# Altium PCB agent-mother.PcbDoc (part 1 of 2)
Units mil, origin at the board's own origin, x right, y up, seen from the top; angles counter-clockwise.
Board outline 953.44 x 2371.62 mil, 4 copper layers (Top Layer, Layer 1, Layer 2, Bottom Layer), stack 62.493 mil thick; 58 components, 47 nets, 288 pads, 86 vias.
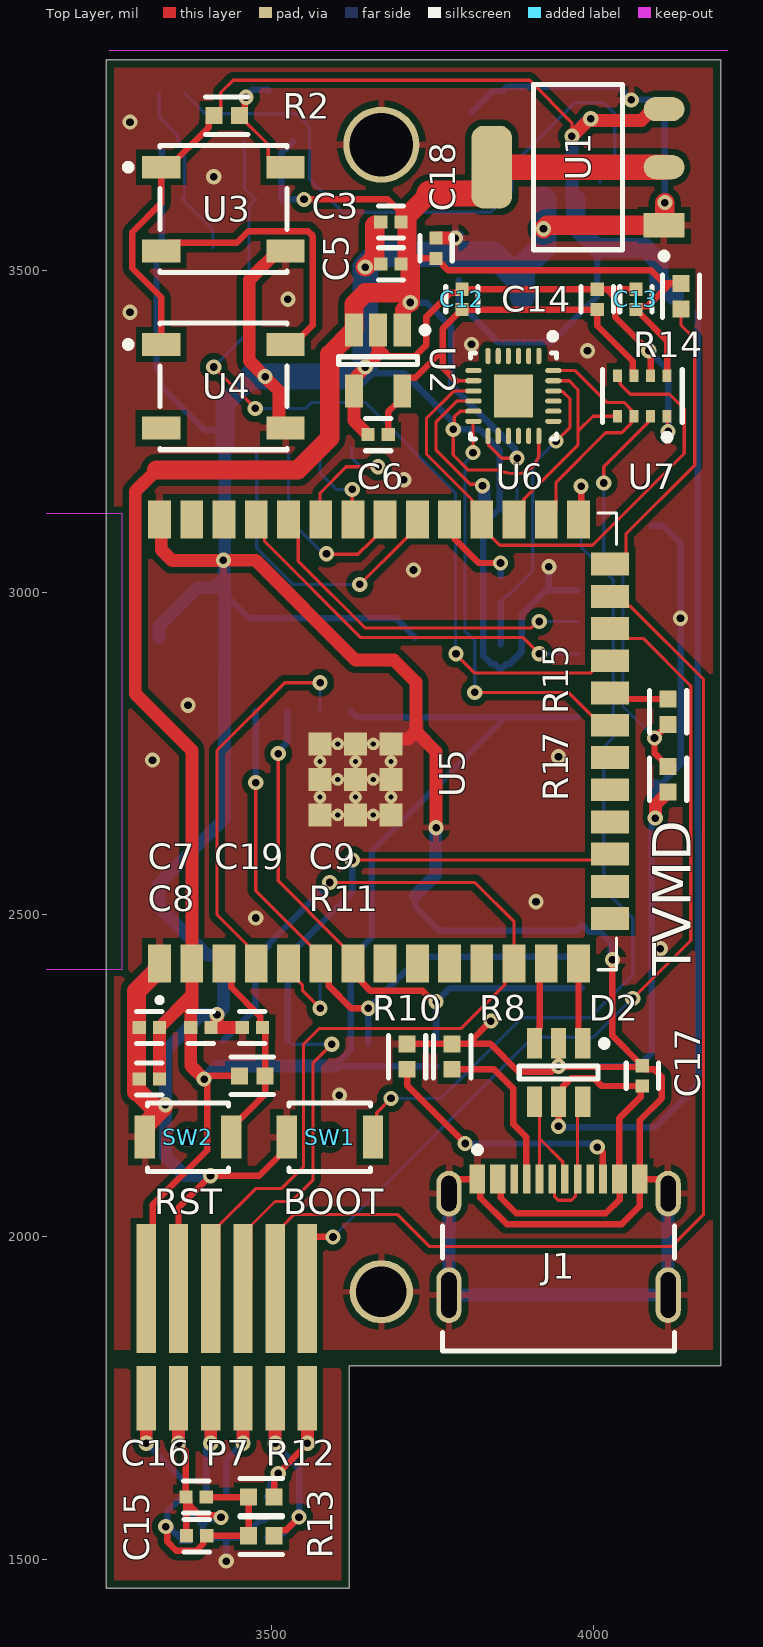
[diagram p0: Top Layer view]
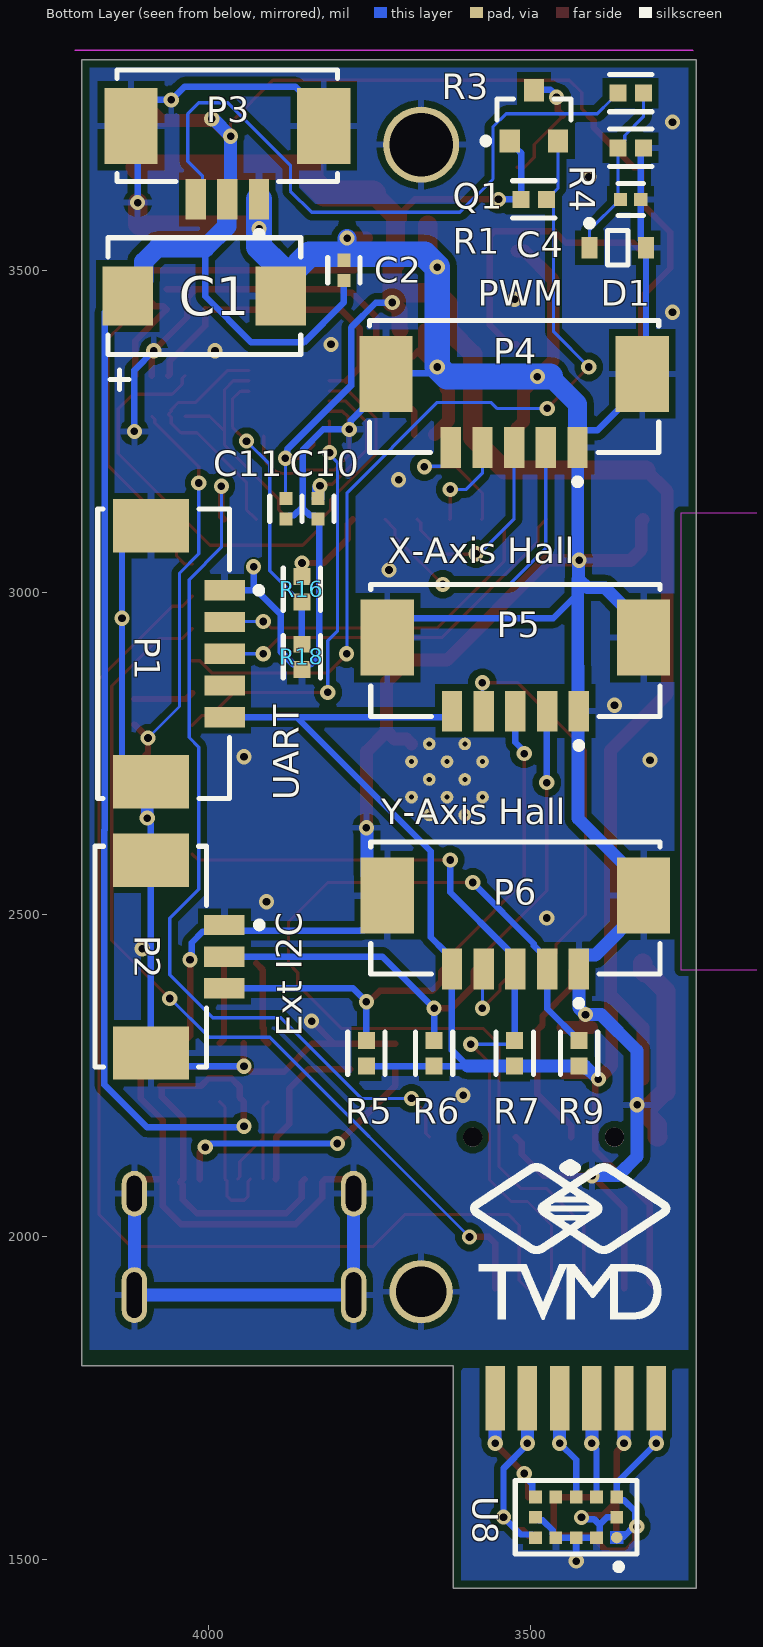
[diagram p1: Bottom Layer view, seen from below]
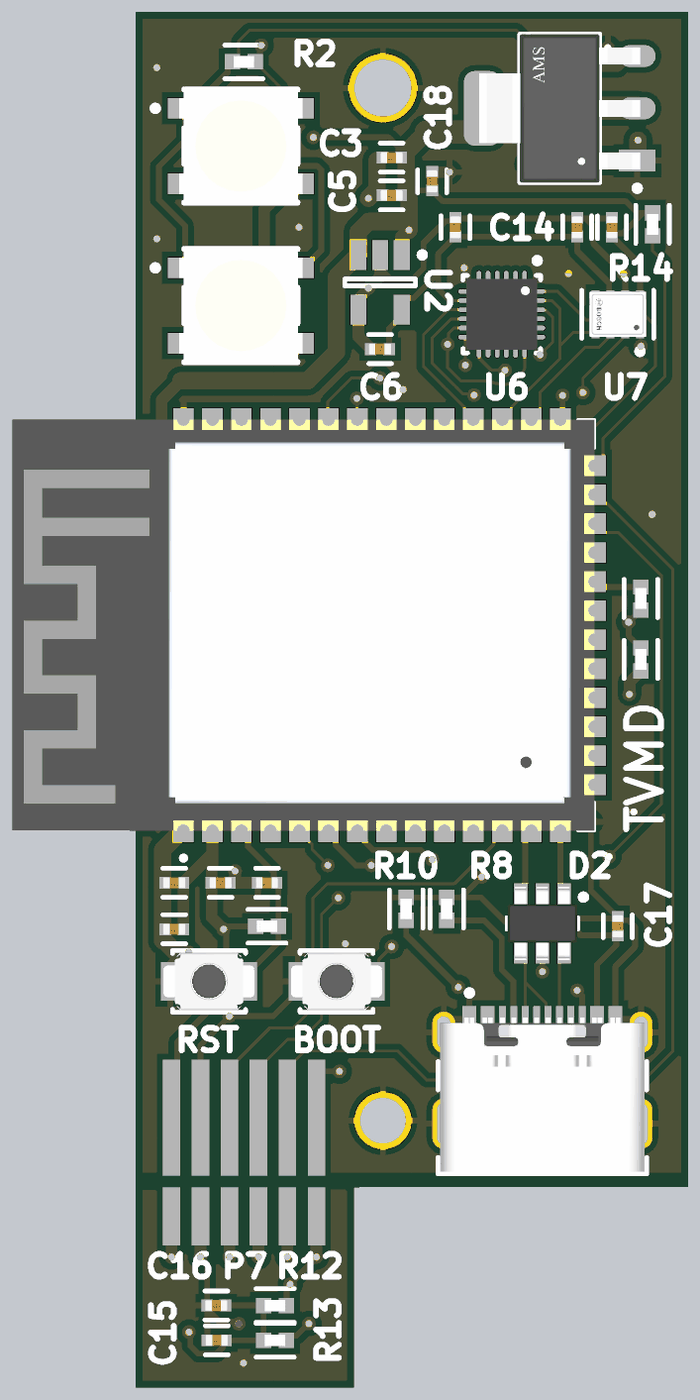
[diagram p2: 3D render of the assembled board from above, using the file's embedded part models]
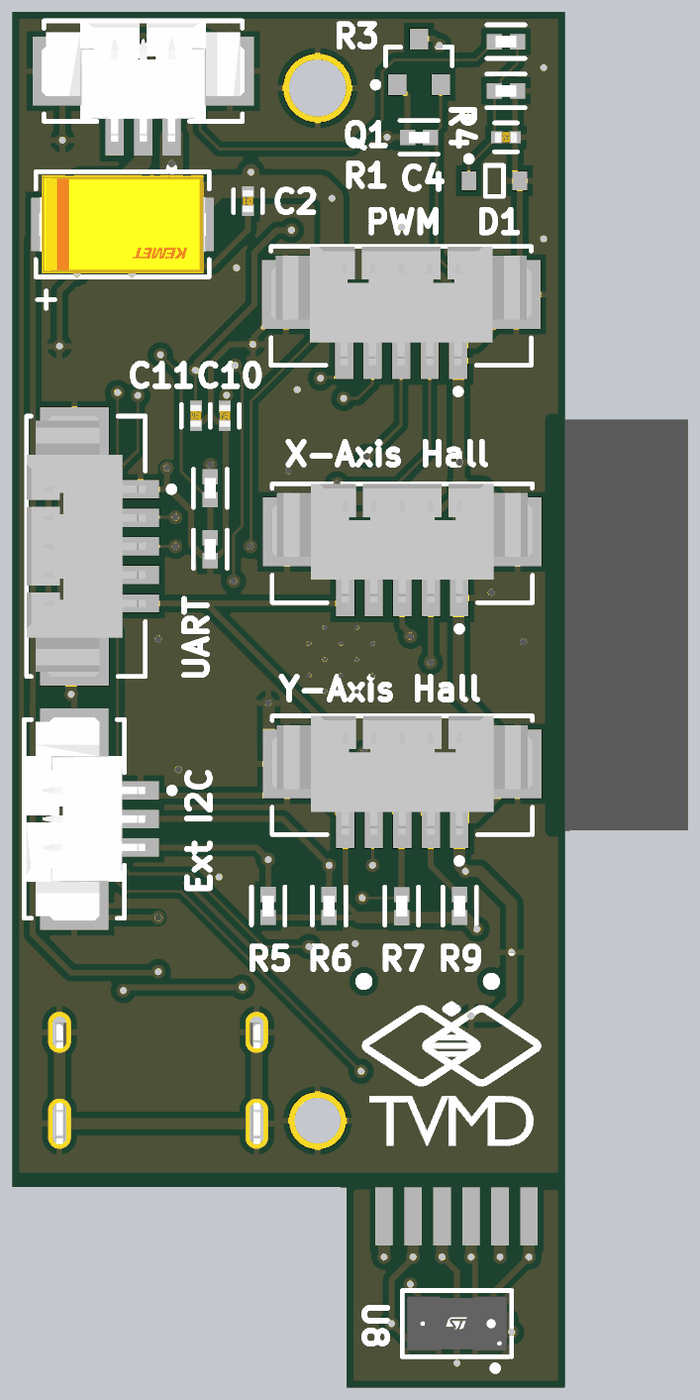
[diagram p3: 3D render of the assembled board from below, using the file's embedded part models]

## Layer stack, top to bottom
Top Solder: solder mask 0.4, Solder Resist, Dk 3.8
Top Layer: signal copper 1.4
Dielectric 2: prepreg 8.2835, PP-006, Dk 4.6
Layer 1: signal copper 0.5984
Dielectric 1: dielectric 41.9291, FR-4, Dk 4.6
Layer 2: signal copper 0.5984
Dielectric 3: prepreg 8.2835, PP-006, Dk 4.6
Bottom Layer: signal copper 1.4
Bottom Solder: solder mask 0.4, Solder Resist, Dk 3.8

## Board outline
3243.17,1455 3243.17,3826.62 4196.61,3826.62 4196.61,1800 3620,1800 3620,1455
cut-out: 3248.05,3840.78 3248.68,3841.4 4207.77,3841.4

## Design rules (kind name [scope] priority, off if disabled: settings)
BoardOutlineClearance [All] p1: gap=11.81 ignorepadtopadclearanceinfootprint=FALSE
Clearance [All] p1: gap=10 ignorepadtopadclearanceinfootprint=TRUE except(0: Arc-Hole Track-Hole SMDPad-Hole THPad-Hole Via-Hole Fill-Hole Poly-Hole Region-Hole Text-Hole; 5: Arc-Arc Arc-Track Track-Track SMDPad-SMDPad SMDPad-THPad THPad-THPad; 7.87: Arc-SMDPad Track-SMDPad Track-THPad)
HoleSize [IsVia] p1: absolutevalues=TRUE maxlimit=248.03 minlimit=7.87 maxpercent=80.000 minpercent=20.000
MinimumAnnularRing [All] p1: minimumring=5.12
MinimumSolderMaskSliver [All] p1: minsoldermaskwidth=3.94
PolygonConnect [All] p1: connectstyle=Relief reliefconductorwidth=10 reliefentries=4 polygonreliefangle="90 Angle" airgapwidth=10
RoutingVias [All] p1: holewidth=11.81 width=19.68 viastyle="Through Hole" minholewidth=11.81 minwidth=17.72 maxholewidth=28 maxwidth=50
SilkToSolderMaskClearance [IsPad] p1: minsilkscreentomaskgap=5.91 clearancetoexposedcopper=TRUE
SolderMaskExpansion [All] p1: expansion=1.5 istentingtop=FALSE
Width [All] p1: maxlimit=100 minlimit=5 preferedwidth=10
27 further rules are at their usual default settings.

## Classes and differential pairs
net class USB: GND NetD2_4 NetD2_6 NetJ1_A5 NetJ1_A8 NetJ1_B5 NetJ1_B8 "USB D+" "USB D-" VCC
net class Power: +1V8 +3V3 GND V_Bat V_Bat_Measure VCC
net class IMU: +1V8 +3V3 GND IMU_CS IMU_INT NetC10_1 NetU6_7 NetU6_21 NetU6_25 SCLK SDI SDO
net class BMP: +1V8 +3V3 BMP_CS GND SCLK SDI SDO
net class MCU: +3V3 BMP_CS BMP_CS_3V3 BOOT esc_p1_pwm esc_p2_pwm EXT_SCL EXT_SDA GND Hall_INT_x Hall_INT_y IMU_CS IMU_CS_3V3 IMU_INT LED NetU5_10 NetU5_11 NetU5_15 NetU5_16 NetU5_18 NetU5_19 NetU5_20 NetU5_21 NetU5_22 NetU5_38 NetU5_39 OPT_INT OPT_shutdown RST RX SCL SCLK SDA SDI SDO TX "USB D+" "USB D-" VDD_SPI_EN x_servo_pwm y_servo_pwm
net class LED: +3V3 GND LED NetQ1_3 NetU3_2 NetU4_2 VCC
net class CNT: +3V3 esc_p1_pwm esc_p2_pwm EXT_SCL EXT_SDA GND Hall_INT_x Hall_INT_y NetP1_4 RX SCL SDA TX x_servo_pwm y_servo_pwm
net class OPT: +3V3 EXT_OPT+3V3 EXT_OPT_GND EXT_OPT_INT EXT_OPT_SCL EXT_OPT_SDA EXT_OPT_shutdown GND NetJ1_A8 NetJ1_B8 NetP1_4 NetU4_2 NetU5_10 NetU5_11 NetU5_15 NetU5_16 NetU5_18 NetU5_19 NetU5_20 NetU5_21 NetU5_22 NetU5_38 NetU5_39 NetU6_7 NetU6_21 NetU6_25 NetU8_8 OPT_INT OPT_shutdown SCL SDA
component class agent-mother-sensor: C10 C11 C12 C13 C14 C15 C16 P7 R12 R13 U6 U7 U8
component class agent-mother: C1 C2 C3 C4 C5 C6 C7 C8 C9 C17 C18 C19 D1 D2 J1 P1 P2 P3 P4 P5 P6 Q1 R1 R2 R3 R4 R5 R6 R7 R8 R9 R10 R11 R14 R15 R16 R17 R18 SW1 SW2 U1 U2 U3 U4 U5

## Components (designator, comment, footprint, x,y, rotation, side; value= is the part's Value field where it differs from the comment)
C1 "100uF" FP-T495D107K016ATE125-MFG 4006.5,3460 r0 bottom
C2 "1uF" FP-C0402-BB-MFG 3790,3500 r90 bottom value=0.1uF
C3 "10uF" FP-C0402-BB-MFG 3685,3575 r180 top value=0.1uF
C4 "0.1uF" FP-C0402-BB-MFG 3345,3610 r180 bottom
C5 "1uF" FP-C0402-BB-MFG 3685,3510 r180 top value=0.1uF
C6 "1uF" FP-C0402-BB-MFG 3665,3245 r180 top value=0.1uF
C7 "10uF" FP-C0402-BB-MFG 3310,2325 r180 top value=0.1uF
C8 "0.1uF" FP-C0402-BB-MFG 3310,2245 r180 top
C9 "1uF" FP-C0402-BB-MFG 3470,2325 r180 top value=0.1uF
C10 "0.1uF" FP-C0402-BB-MFG 3830,3130 r270 bottom
C11 "0.1uF" FP-C0402-BB-MFG 3880,3130 r270 bottom
C12 "0.1uF" FP-C0402-BB-MFG 3795,3455 r90 top
C13 "0.1uF" FP-C0402-BB-MFG 4065,3455 r90 top
C14 "0.1uF" FP-C0402-BB-MFG 4005,3455 r90 top
C15 "4.7uF" FP-C0402-BB-MFG 3383.31,1536.35 r180 top value=0.1uF
C16 "0.1uF" FP-C0402-BB-MFG 3382.56,1596.35 r180 top
C17 "0.1uF" FP-C0402-BB-MFG 4075,2250 r90 top
C18 "10uF" FP-C0402-BB-MFG 3755,3534.25 r90 top value=0.1uF
C19 "10uF" FP-C0402-BB-MFG 3390,2325 r0 top value=0.1uF
D1 "3V3" ONSC-SOD-323-2-477-02_V 3365,3535 r180 bottom
D2 "USBLC6-2P6" "SOT-23-6 USBLC6" 3945,2255 r270 top
J1 "217179-0001" FP-217179-0001-MFG 3945,1955 r0 top
P1 "UART" MOLX-52361-0571-5_V 3975,2905 r270 bottom
P2 "Ext I2C" FP-53261-0371-MFG 4089.53,2435 r270 bottom
P3 "Power Source" FP-53261-0371-MFG 3970.79,3724.17 r0 bottom
P4 "PWM" MOLX-52361-0571-5_V 3525.79,3225 r0 bottom
P5 "X-Axis Hall" MOLX-52361-0571-5_V 3523.82,2815.83 r0 bottom
P6 "Y-Axis Hall" MOLX-52361-0571-5_V 3523.82,2415.83 r0 bottom
P7 "Out board connector" "Edge Connector" 3430.24,1810 r0 top
Q1 "BSS138LT1" ONSC-SOT-23-3-318-08_V 3495,3740 r90 bottom
R1 "100k" FP-CRCW0402-e3-IPC_A 3495,3610 r180 bottom
R2 "100k" FP-CRCW0402-e3-IPC_A 3430,3740 r0 top
R3 "100k" FP-CRCW0402-e3-IPC_A 3345,3775 r0 bottom
R4 "470k" FP-CRCW0402-e3-IPC_A 3345,3690 r0 bottom
R5 "4k7" FP-CRCW0402-e3-IPC_A 3755,2285 r270 bottom
R6 "4k7" FP-CRCW0402-e3-IPC_A 3650,2285 r270 bottom
R7 "4k7" FP-CRCW0402-e3-IPC_A 3525,2284.77 r270 bottom
R8 "5k1" FP-CRCW0402-e3-IPC_A 3780,2280 r90 top
R9 "4k7" FP-CRCW0402-e3-IPC_A 3425,2285 r270 bottom
R10 "5k1" FP-CRCW0402-e3-IPC_A 3710,2280 r90 top
R11 "10k" FP-CRCW0402-e3-IPC_A 3470,2250 r180 top
R12 "10k" FP-CRCW0402-e3-IPC_A 3483.98,1596.35 r180 top
R13 "10k" FP-CRCW0402-e3-IPC_A 3483.98,1536.35 r180 top
R14 "10k" FP-CRCW0402-e3-IPC_A 4135,3460 r90 top
R15 "5k1" FP-CRCW0402-e3-IPC_A 4115,2815 r270 top
R16 "5k1" FP-CRCW0402-e3-IPC_A 3855,3005 r270 bottom
R17 "4k7" FP-CRCW0402-e3-IPC_A 4115,2710 r270 top
R18 "4k7" FP-CRCW0402-e3-IPC_A 3855,2900 r270 bottom
SW1 "BOOT" FP-B3U-1000P-B-MFG 3590,2155 r0 top
SW2 "RST" FP-B3U-1000P-B-MFG 3370,2155 r0 top
U1 "AMS1117-3.3" FP-AMS1117-IPC_A 3975,3660 r180 top
U2 "TPS78218DDCR" SOT-23-OT5_M 3665,3360 r270 top
U3 "ws2812" ADA-RGB-1655_V 3425,3595 r0 top
U4 "ws2812" ADA-RGB-1655_V 3425,3320 r0 top
U5 "ESP32-S3-WROOM-1-N8R2" XCVR_ESP32S3WROOM1N8R8 3533.03,2769.06 r90 top
U6 "ICM-20948" TDK-QFN-24_L 3875,3305 r270 top
U7 "BMP280" FP-BMP280-MFG 4075,3305 r270 top
U8 "VL53L0CXV0DH/1" FP-LGA-12-MFG 3429.49,1565 r180 bottom

## Footprints (in the part's own frame and the unit in brackets; to place one, negate y for a bottom-side part, rotate by r counter-clockwise, add the part's x,y. Pads: shape width x height; smd on the part's side, far side on the other; paste and mask are expansions set on the pad)
ADA-RGB-1655_V [mm] "SMD, 4-Leads, Body 5x5mm"
  rect 1.5x0.9 smd: 1(-2.45,1.65) 2(-2.45,-1.65) 3(2.45,-1.65) 4(2.45,1.65)
  silkscreen extent -3.87,-2.5 2.5,2.5, body extent -2.7,-2.5 2.7,2.5, height 1.68
"Edge Connector" [mil]
  rect 30x100 smd mask+0: 1(-125,-60) 2(-75,-60) 3(-25,-60) 4(25,-60) 5(75,-60) 6(125,-60)
  rect 30x100 smd far side paste+0 mask+0: 1(-125,-60) 2(-75,-60) 3(-25,-60) 4(25,-60) 5(75,-60) 6(125,-60)
  rect 30x200 smd paste+0 mask+0: 7(125,110) 8(75,110) 9(25,110) 10(-25,110) 11(-75,110) 12(-125,110)
  Top Layer lines w20: -125,-130 -125,-60 ; -75,-130 -75,-60 ; -25,-130 -25,-60 ; 25,-130 25,-60 ; 75,-130 75,-60 ; 125,-130 125,-60
  Bottom Layer lines w20: -125,-130 -125,-60 ; -75,-130 -75,-60 ; -25,-130 -25,-60 ; 25,-130 25,-60 ; 75,-130 75,-60 ; 125,-130 125,-60
FP-53261-0371-MFG [mm]
  rect 0.8x1.6 smd paste+0 mask+0: 1(-1.25,2.9) 2(0,2.9) 3(1.25,2.9)
  rect 2.1x3 smd paste+0 mask+0: 4(-3.8,0) 5(3.8,0)
  silkscreen extent -4.35,-2.2 4.35,4.4, body extent -4.45,-2.1 4.45,3.1, height 3.6
FP-217179-0001-MFG [mm]
  rrect100% 1x1.8 hole 1.4 slot 0.6 at 0 deg paste-1000 mask+0: 1(-4.32,2.85) 2(4.32,2.85)
  rrect100% 1x2.2 hole 1.8 slot 0.6 at 0 deg paste-1000 mask+0: 3(-4.32,-1.15) 4(4.32,-1.15)
  rect 0.6x1.15 smd paste+0 mask+0: A1-B12(-3.2,3.425) A4-B9(-2.4,3.425) B1-A12(3.2,3.425) B4-A9(2.4,3.425)
  rect 0.3x1.15 smd paste+0 mask+0: A5(-1.25,3.425) A6(-0.25,3.425) A7(0.25,3.425) A8(1.25,3.425) B5(1.75,3.425) B6(0.75,3.425) B7(-0.75,3.425) B8(-1.75,3.425)
  silkscreen extent -4.57,-3.35 4.57,4.7, body extent -4.92,-3.45 4.92,4.1, height 0.25
FP-AMS1117-IPC_A [mm]
  rect 1.604x0.952 smd paste+0 mask+0: 1(-3.395,2.29)
  rrect100% 1.604x0.952 smd paste+0 mask+0: 2(-3.395,0) 3(-3.395,-2.29)
  rrect59% 1.604x3.262 smd paste+0 mask+0: 4(3.395,0)
  silkscreen extent -3.52,-3.25 1.75,3.62, body extent -4.7,-3.75 4.7,3.75, height 0.25
FP-B3U-1000P-B-MFG [mm]
  rect 0.8x1.7 smd paste+0 mask+0: 1(-1.7,0) 2(1.7,0)
  round 0.75 hole 0.75 unplated paste-1000 mask+0: ""(0,0)
  silkscreen extent -1.6,-1.35 1.6,1.35, body extent -2.2,-1.45 2.2,1.45, height 0.25
FP-BMP280-MFG [mm]
  rect 0.5x0.35 smd paste+0 mask+0: 1(0.8,0.975) 2(0.8,0.325) 3(0.8,-0.325) 4(0.8,-0.975) 5(-0.8,-0.975) 6(-0.8,-0.325) 7(-0.8,0.325) 8(-0.8,0.975)
  silkscreen extent -1.05,-1.58 1.75,1.58, body extent -1.55,-1.8 1.55,1.8, height 0.25
FP-C0402-BB-MFG [mm]
  rect 0.52x0.52 smd paste+0 mask+0: 1(-0.4,0) 2(0.4,0)
  silkscreen extent -0.5,-0.64 0.5,0.64, body extent -0.5,-0.25 0.5,0.25, height 0.55
FP-CRCW0402-e3-IPC_A [mil]
  rect 26.31x26.48 smd paste+0 mask+0: 1(-19.77,0) 2(19.77,0)
  silkscreen extent -33,-29 33,29, body extent -20,-10 20,10, height 16
FP-LGA-12-MFG [mm]
  round 0.45 smd paste+0 mask+0: 1(1.6,-0.8)
  rect 0.5x0.5 smd paste+0 mask+0: 2(0.8,-0.8) 3(0,-0.8) 4(-0.8,-0.8) 5(-1.6,-0.8) 6(-1.6,0) 7(-1.6,0.8) 8(-0.8,0.8) 9(0,0.8) 10(0.8,0.8) 11(1.6,0.8) 12(1.6,0)
  Top Layer region: 1.35,-0.55 1.93,-0.55 1.93,-0.8 1.85,-0.8 1.85,-1.05 1.35,-1.05
  silkscreen extent -2.4,-2.07 2.4,1.45, body extent -2.2,-1.2 2.2,1.2, height 1.05
FP-T495D107K016ATE125-MFG [mm]
  rect 1.99x2.33 smd paste+0 mask+0: 1(-3.01,0) 2(3.01,0)
  silkscreen extent -3.8,-2.3 3.8,3.68, body extent -3.65,-2.15 3.65,2.15, height 3.1
MOLX-52361-0571-5_V [mm] "SMD, 5-Leads, Body 11.4x5.2mm, Pitch 1.25mm"
  rect 0.8x1.6 smd: 1(-2.5,0) 2(-1.25,0) 3(0,0) 4(1.25,0) 5(2.5,0)
  rect 2.1x3 smd: MP1(-5.05,-2.9) MP2(5.05,-2.9)
  silkscreen extent -5.7,-5 5.7,1.47, body extent -5.7,-5 5.7,0.2, height 3.4
ONSC-SOD-323-2-477-02_V [mm] "SOD, 2-Leads, Body 1.7x1.25mm"
  rect 0.63x0.83 smd: 1(-1.115,0) 2(1.115,0)
  silkscreen extent -1.24,-0.67 0.4,1.09, body extent -0.85,-0.63 0.85,0.63, height 1.06
ONSC-SOT-23-3-318-08_V [mm] "SOT23, 3-Leads, Body 2.92x1.3mm, Pitch 0.95mm"
  rect 0.9x0.8 smd: 1(-1,0.95) 2(-1,-0.95) 3(1,0)
  silkscreen extent -1.12,-1.46 0.65,2.03, body extent -0.65,-1.46 0.65,1.46, height 1.11
"SOT-23-6 USBLC6" [mm]
  rect 1.2x0.6 smd: 1(-1.15,0.95) 2(-1.15,0) 3(-1.15,-0.95) 4(1.15,-0.95) 5(1.15,0) 6(1.15,0.95)
  silkscreen extent -1.27,-1.55 0.25,1.93, body extent -1.6,-1.53 1.6,1.53, height 1.45
SOT-23-OT5_M [mm] "SOT23, 5-Leads, Body 2.9x1.7mm, Pitch 0.95mm, Lead Span 2.8mm, IPC Low Density"
  rect 1.3x0.7 smd: 1(-1.2,0.95) 2(-1.2,0) 3(-1.2,-0.95) 4(1.2,-0.95) 5(1.2,0.95)
  silkscreen extent -1.32,-1.55 0.15,1.98, body extent -0.9,-1.55 0.9,1.55, height 1.45
TDK-QFN-24_L [mm] "QFN, 24-Leads, Body 3.10x3.10mm, Pitch 0.40mm, Thermal Pad 1.70x1.54mm, IPC High Density"
  oval 0.65x0.2 smd: 1(-1.575,1) 2(-1.575,0.6) 3(-1.575,0.2) 4(-1.575,-0.2) 5(-1.575,-0.6) 6(-1.575,-1) 13(1.575,-1) 14(1.575,-0.6) 15(1.575,-0.2) 16(1.575,0.2) 17(1.575,0.6) 18(1.575,1)
  oval 0.2x0.65 smd: 7(-1,-1.575) 8(-0.6,-1.575) 9(-0.2,-1.575) 10(0.2,-1.575) 11(0.6,-1.575) 12(1,-1.575) 19(1,1.575) 20(0.6,1.575) 21(0.2,1.575) 22(-0.2,1.575) 23(-0.6,1.575) 24(-1,1.575)
  rect 1.7x1.54 smd: 25(0,0)
  silkscreen extent -2.47,-1.7 1.7,1.7, body extent -1.55,-1.55 1.55,1.55, height 1.05
XCVR_ESP32S3WROOM1N8R8 [mm]
  rect 1.5x0.9 smd: 1(-8.75,5.26) 2(-8.75,3.99) 3(-8.75,2.72) 4(-8.75,1.45) 5(-8.75,0.18) 6(-8.75,-1.09) 7(-8.75,-2.36) 8(-8.75,-3.63) 9(-8.75,-4.9) 10(-8.75,-6.17) 11(-8.75,-7.44) 12(-8.75,-8.71) 13(-8.75,-9.98) 14(-8.75,-11.25) 27(8.75,-11.25) 28(8.75,-9.98) 29(8.75,-8.71) 30(8.75,-7.44) 31(8.75,-6.17) 32(8.75,-4.9) 33(8.75,-3.63) 34(8.75,-2.36) 35(8.75,-1.09) 36(8.75,0.18) 37(8.75,1.45) 38(8.75,2.72) 39(8.75,3.99) 40(8.75,5.26)
  rect 0.9x1.5 smd: 15(-6.985,-12.5) 16(-5.715,-12.5) 17(-4.445,-12.5) 18(-3.175,-12.5) 19(-1.905,-12.5) 20(-0.635,-12.5) 21(0.635,-12.5) 22(1.905,-12.5) 23(3.175,-12.5) 24(4.445,-12.5) 25(5.715,-12.5) 26(6.985,-12.5)
  rect 0.9x0.9 smd: 41_1(-1.5,-2.46) 41_2(-2.9,-2.46) 41_3(-0.1,-2.46) 41_4(-2.9,-3.86) 41_5(-1.5,-3.86) 41_6(-0.1,-3.86) 41_7(-2.9,-1.06) 41_8(-1.5,-1.06) 41_9(-0.1,-1.06)
  round 0.5 hole 0.2 mask+0: 41_10(-1.5,-1.76) 41_11(-2.9,-1.76) 41_12(-0.1,-1.76) 41_13(-2.9,-3.16) 41_14(-1.5,-3.16) 41_15(-0.1,-3.16) 41_16(-2.2,-1.06) 41_17(-0.8,-1.06) 41_18(-2.2,-2.46) 41_19(-0.8,-2.46) 41_20(-2.2,-3.86) 41_21(-0.8,-3.86)
  Keep-Out Layer region: 9,6.75 -9,6.75 -9,12.75 9,12.75
  Keep-Out Layer region: 9,6.75 -9,6.75 -9,12.75 9,12.75
  silkscreen extent -10.3,-12.75 9,5.36, body extent -9,-12.75 9,12.75, height 3.25

## Part data
C1: library part CMP-2000-07207-2, "CAP TANT 100UF 10% 16V 2917", Case Code (Imperial)=2917, Case Code (Metric)=7343, Dielectric Material=Tantalum, ESR (Equivalent Series Resistance)=125mR, Max Operating Temperature=125°C, Min Operating Temperature=-55°C, Package Quantity=1, Tolerance=10%, Voltage=16V, Capacitance=100uF, Case/Package=2917, Construction=Flat, Depth=4.3mm, Dissipation Factor=8%, Failure Rate=0.001%, Features="General Purpose", Height=2.8mm, Height - Seated (Max)=0.122inch, Length=7.3mm, Life (Hours)=2000Hour, Mount="Surface Mount", Number of Pins=2, Packaging="Tape and Reel", Polarity=Polar, Radiation Hardening=No, REACH SVHC="No SVHC", RoHS Compliant=Yes, Series=T495, Termination=SMD/SMT, Voltage Rating=16V, Voltage Rating (DC)=16V, Weight=0.023634oz, Width=0.169inch
C2 C5 C6 C9: library part CMP-2008-02108-2, "CAP CER 1uF 16V X7R 0402", Capacitance=0.1uF, Manufacturer=Kemet, Manufacturer Part Number=C0402C104K4RACTU, Package=C0402-BB, Temperature="-55°C to +125°C", Temperature Characteristic=X7R, Temperature Coefficient=15%, Temperature Range High=+125°C, Temperature Range Low=-55°C, Tolerance=0.1, Voltage Rating="16 V", Automotive=No, Category=Cap, ComponentLink2Description=Datasheet, ComponentLink2URL=https://content.kemet.com/datasheets/KEM_C1002_X7R_SMD.pdf, Device Class L1="Passive Components", Device Class L2=Capacitors, Device Class L3="Ceramic Capacitors", Digikey Description="CAP CER 0.1UF 16V X7R 0402", Height=0.55mm, Ipc Land Pattern Name=CAPC10050X50, Lead Free=Yes, Material=Ceramic, Mouser Description="Cap Ceramic 0.1uF 16V X7R 10% SMD 0402 125?C Paper T/R - Tape and Reel (Alt: C0402C104K4RAC TU)", Octopart=https://octopart.com/c0402c104k4ractu-kemet-94158, RoHS=TRUE
C3 C7 C18 C19: library part CMP-2008-02108-2, "CAP CER 22uF 16V X7R 0402", Capacitance=0.1uF, Manufacturer=Kemet, Manufacturer Part Number=C0402C104K4RACTU, Package=C0402-BB, Temperature="-55°C to +125°C", Temperature Characteristic=X7R, Temperature Coefficient=15%, Temperature Range High=+125°C, Temperature Range Low=-55°C, Tolerance=0.1, Voltage Rating="16 V", Automotive=No, Category=Cap, ComponentLink2Description=Datasheet, ComponentLink2URL=https://content.kemet.com/datasheets/KEM_C1002_X7R_SMD.pdf, Device Class L1="Passive Components", Device Class L2=Capacitors, Device Class L3="Ceramic Capacitors", Digikey Description="CAP CER 0.1UF 16V X7R 0402", Height=0.55mm, Ipc Land Pattern Name=CAPC10050X50, Lead Free=Yes, Material=Ceramic, Mouser Description="Cap Ceramic 0.1uF 16V X7R 10% SMD 0402 125?C Paper T/R - Tape and Reel (Alt: C0402C104K4RAC TU)", Octopart=https://octopart.com/c0402c104k4ractu-kemet-94158, RoHS=TRUE
C4 C8 C10 C11 C12 C13 C14 C16 C17: library part CMP-2008-02108-2, "CAP CER 0.1uF 16V X7R 0402", Manufacturer=Kemet, Manufacturer Part Number=C0402C104K4RACTU, Package=C0402-BB, Temperature="-55°C to +125°C", Temperature Characteristic=X7R, Temperature Coefficient=15%, Temperature Range High=+125°C, Temperature Range Low=-55°C, Tolerance=0.1, Voltage Rating="16 V", Automotive=No, Capacitance=0.1uF, Category=Cap, ComponentLink2Description=Datasheet, ComponentLink2URL=https://content.kemet.com/datasheets/KEM_C1002_X7R_SMD.pdf, Device Class L1="Passive Components", Device Class L2=Capacitors, Device Class L3="Ceramic Capacitors", Digikey Description="CAP CER 0.1UF 16V X7R 0402", Height=0.55mm, Ipc Land Pattern Name=CAPC10050X50, Lead Free=Yes, Material=Ceramic, Mouser Description="Cap Ceramic 0.1uF 16V X7R 10% SMD 0402 125?C Paper T/R - Tape and Reel (Alt: C0402C104K4RAC TU)", Octopart=https://octopart.com/c0402c104k4ractu-kemet-94158, RoHS=TRUE
C15: library part CMP-2008-02108-2, "CAP CER 4.7uF 16V X7R 0402", Capacitance=0.1uF, Manufacturer=Kemet, Manufacturer Part Number=C0402C104K4RACTU, Package=C0402-BB, Temperature="-55°C to +125°C", Temperature Characteristic=X7R, Temperature Coefficient=15%, Temperature Range High=+125°C, Temperature Range Low=-55°C, Tolerance=0.1, Voltage Rating="16 V", Automotive=No, Category=Cap, ComponentLink2Description=Datasheet, ComponentLink2URL=https://content.kemet.com/datasheets/KEM_C1002_X7R_SMD.pdf, Device Class L1="Passive Components", Device Class L2=Capacitors, Device Class L3="Ceramic Capacitors", Digikey Description="CAP CER 0.1UF 16V X7R 0402", Height=0.55mm, Ipc Land Pattern Name=CAPC10050X50, Lead Free=Yes, Material=Ceramic, Mouser Description="Cap Ceramic 0.1uF 16V X7R 10% SMD 0402 125?C Paper T/R - Tape and Reel (Alt: C0402C104K4RAC TU)", Octopart=https://octopart.com/c0402c104k4ractu-kemet-94158, RoHS=TRUE
D1: library part CMP-1060-00672-1, "Zener Voltage Regulator, 300 mW, 2-Pin SOD-323, Pb-Free, Tape and Reel", Manufacturer="On Semiconductor", PartNumber=MM3Z3V3T1G, ComponentLink1Description="Manufacturer URL", ComponentLink1URL=http://www.onsemi.com/, ComponentLink2Description=Datasheet, ComponentLink2URL=http://www.onsemi.cn/pub_link/Collateral/MM3Z2V4T1-D.PDF, ComponentLink3Description="Package Specification", ComponentLink3URL=http://www.onsemi.com/pub_link/Collateral/477-02.PDF.1, DatasheetVersion="Rev. 9", Mounting Technology="Surface Mount", P Max (W)=0.3, PackageDescription="2-Pin SOD, Body 1.7 x 1.25 mm", PackageReference=SOD-323-2-477-02, PackageVersion="Rev. H, 03/2007", Packing="Tape and Reel", RoHS=Pb-Free, VZ Typ (V)=3.3
D2: "TVS DIODE 5.25V 17V SOT666", Breakdown Voltage=6V, Capacitance=3.5pF, Case/Package=SOT-666, Clamping Voltage=17V, Leakage Current=150nA, Max Operating Temperature=125°C, Min Operating Temperature=-40°C, Operating Supply Voltage=5V, Package Quantity=1, Peak Pulse Current=5A, Power Line Protection=Yes, Test Current=1mA, Contact Plating=Tin, Depth=1.3mm, Direction=Unidirectional, Element Configuration=Dual, ESD Protection=Yes, Height=0.6mm, Lead Free="Lead Free", Length=1.7mm, Max Breakdown Voltage=6V, Max Reverse Leakage Current=150nA, Min Breakdown Voltage=6V, Mount="Surface Mount", Number of Bidirectional Channels=2, Number of Channels=2, Number of Elements=1, Number of Pins=6, Packaging="Tape and Reel", Polarity=Unidirectional, Radiation Hardening=No, REACH SVHC="No SVHC", Reverse Breakdown Voltage=6V, Reverse Standoff Voltage=5V, Termination=SMD/SMT, Width=1.3mm, Working Voltage=5V
J1: library part CMP-04767-000028-1, "CONN RCP USB2.0 TYP C 24P SMD RA"
P1 P4 P5 P6: library part CMP-2000-05249-1, "Male Header, Pitch 1.25 mm, 1 x 5 Position, Height 3.4 mm, RoHS, Tape and Reel", Current Rating=1A, Manufacturer=Molex, Voltage Rating=125V, Brand=Molex, Contact Material=PhosphorBronze, Contact Plating=Tin, Datasheet URL=http://datasheet.octopart.com/532610571-Molex-datasheet-8343080.pdf, Datasheet Version="Rev. D, 04/2004", Factory Pack Quantity=1000, Housing Material=Thermoplastic, Manufacturer URL=http://www.molex.com/, Mounting Angle=Right, Mounting Style=SMD/SMT, Number of Positions=5, Number of Positions / Contacts=5, Number of Rows=1, Packaging=Reel, Pitch=1.25mm, Product Category=Headers&WireHousings, Product Type=Headers, RoHS=Details, Series=53261, Termination Style=SMD, Tradename=PicoBlade, Type=Shrouded
P2 P3: library part CMP-04776-000071-1, "CONN HEADER SMD R/A 3POS 1.25MM", Ambient Temperature Range High=+105°C, Ambient Temperature Range Low=-40°C, Current Rating=1A, Manufacturer=Molex, Manufacturer Part Number=53261-0371, Package=0, Temperature="-40°C to +105°C", Voltage Rating=125V, Automotive=No, Category=Conn, ComponentLink2Description=Datasheet, ComponentLink2URL=https://www.molex.com/webdocs/datasheets/pdf/en-us/0532610371_PCB_HEADERS.pdf, Conn Gender=Male, Conn Orientation="Right Angle", Contact Material=Tin,Nickel, Device Class L1=Connectors, Device Class L2="Headers and Wire Housings", Device Class L3=unset, Digikey Description="CONN HEADER SMD R/A 3POS 1.25MM", Footprint Url=https://www.molex.com/pdm_docs/sd/532610371_sd.pdf, Height=3.6mm, Lead Free=Yes, Mouser Description="1.25mm (.049\") Pitch PicoBlade Header, Surface Mount, Right Angle, Lead-free, 3 Circuits", Number Of Contacts=3, Number of Rows=1, Octopart=https://octopart.com/53261-0371-molex-655314, Pitch=1.25mm, RoHS=TRUE, Temperature Range High=+105°C, Temperature Range Low=-40°C
P7: "6 pins pcb connector"
Q1: library part CMP-1058-00761-1, "Power MOSFET, BSS138LT1, 200 mA, 50 V, N-Channel, 3-Pin SOT-23, Tape and Reel", Manufacturer="On Semiconductor", Package Type=SOT-23-3, Channel Polarity="N Channel", Ciss Typ (pF)=40, ComponentLink1Description="Manufacturer URL", ComponentLink1URL=http://www.onsemi.com/, ComponentLink2Description=Datasheet, ComponentLink2URL=http://www.onsemi.com/pub_link/Collateral/BSS138LT1-D.PDF, ComponentLink3Description="Package Specification", ComponentLink3URL=http://www.onsemi.cn/pub_link/Collateral/318-08.PDF, Configuration=Single, Coss Typ (pF)=12, Crss Typ (pF)=3.5, DatasheetVersion="Rev. 8", ID Max (A)=0.2, Mounting Technology="Surface Mount", PackageDescription="3-Pin Small Outline Transistor, Body 2.92 x 1.3 mm, Pitch 0.95 mm", PackageReference=SOT-23-3-318-08, PackageVersion="Rev. AP, 11/2009", Packing="Tape and Reel", PartNumber=BSS138LT1, PD Max (W)=0.225, V(BR)DSS Min (V)=50, VGS Max (V)=20, VGS(th) Max (V)=1.5
R1 R2 R3: library part CMP-2002-08122-2, "RES Thick Film, 100kΩ, 0.063W, 0402", Case Code (Imperial)=0402, Case Code (Metric)=1005, Max Operating Temperature=155°C, Max Power Dissipation=63mW, Min Operating Temperature=-55°C, Package Quantity=1, Resistance=5k1, Temperature Coefficient=100ppm/°C, Tolerance=5%, Voltage Rating=50V, Case/Package=0402, Composition="Thick Film", Contact Plating=Tin, Depth=0.5mm, Features="Automotive AEC-Q200", Height=0.35mm, Lead Free="Lead Free", Length=1mm, Military Standard=Not, Mount="Surface Mount", Number of Terminations=2, Packaging="Tape and Reel", Power Rating=63mW, Radiation Hardening=No, Termination=SMD/SMT, Voltage Rating (DC)=50V, Weight=2.3E-05oz, Width=0.5mm
R4: library part CMP-2002-08122-2, "RES Thick Film, 470kΩ, 0.063W, 0402", Case Code (Imperial)=0402, Case Code (Metric)=1005, Max Operating Temperature=155°C, Max Power Dissipation=63mW, Min Operating Temperature=-55°C, Package Quantity=1, Resistance=5k1, Temperature Coefficient=100ppm/°C, Tolerance=5%, Voltage Rating=50V, Case/Package=0402, Composition="Thick Film", Contact Plating=Tin, Depth=0.5mm, Features="Automotive AEC-Q200", Height=0.35mm, Lead Free="Lead Free", Length=1mm, Military Standard=Not, Mount="Surface Mount", Number of Terminations=2, Packaging="Tape and Reel", Power Rating=63mW, Radiation Hardening=No, Termination=SMD/SMT, Voltage Rating (DC)=50V, Weight=2.3E-05oz, Width=0.5mm
R5 R6 R7 R9 R17 R18: library part CMP-2002-08122-2, "RES Thick Film, 4k7Ω, 0.063W, 0402", Case Code (Imperial)=0402, Case Code (Metric)=1005, Max Operating Temperature=155°C, Max Power Dissipation=63mW, Min Operating Temperature=-55°C, Package Quantity=1, Resistance=5k1, Temperature Coefficient=100ppm/°C, Tolerance=5%, Voltage Rating=50V, Case/Package=0402, Composition="Thick Film", Contact Plating=Tin, Depth=0.5mm, Features="Automotive AEC-Q200", Height=0.35mm, Lead Free="Lead Free", Length=1mm, Military Standard=Not, Mount="Surface Mount", Number of Terminations=2, Packaging="Tape and Reel", Power Rating=63mW, Radiation Hardening=No, Termination=SMD/SMT, Voltage Rating (DC)=50V, Weight=2.3E-05oz, Width=0.5mm
R8 R10: library part CMP-2002-08122-2, "RES Thick Film, 5k1Ω, 0.063W, 0402", Case Code (Imperial)=0402, Case Code (Metric)=1005, Max Operating Temperature=155°C, Max Power Dissipation=63mW, Min Operating Temperature=-55°C, Package Quantity=1, Temperature Coefficient=100ppm/°C, Tolerance=5%, Voltage Rating=50V, Case/Package=0402, Composition="Thick Film", Contact Plating=Tin, Depth=0.5mm, Features="Automotive AEC-Q200", Height=0.35mm, Lead Free="Lead Free", Length=1mm, Military Standard=Not, Mount="Surface Mount", Number of Terminations=2, Packaging="Tape and Reel", Power Rating=63mW, Radiation Hardening=No, Resistance=5k1, Termination=SMD/SMT, Voltage Rating (DC)=50V, Weight=2.3E-05oz, Width=0.5mm
R11 R12 R13 R14: library part CMP-2002-08122-2, "RES Thick Film, 10kΩ, 0.063W, 0402", Case Code (Imperial)=0402, Case Code (Metric)=1005, Max Operating Temperature=155°C, Max Power Dissipation=63mW, Min Operating Temperature=-55°C, Package Quantity=1, Resistance=5k1, Temperature Coefficient=100ppm/°C, Tolerance=5%, Voltage Rating=50V, Case/Package=0402, Composition="Thick Film", Contact Plating=Tin, Depth=0.5mm, Features="Automotive AEC-Q200", Height=0.35mm, Lead Free="Lead Free", Length=1mm, Military Standard=Not, Mount="Surface Mount", Number of Terminations=2, Packaging="Tape and Reel", Power Rating=63mW, Radiation Hardening=No, Termination=SMD/SMT, Voltage Rating (DC)=50V, Weight=2.3E-05oz, Width=0.5mm
R15 R16: library part CMP-2002-08122-2, "RES Thick Film, 4k7Ω, 0.063W, 0402", Case Code (Imperial)=0402, Case Code (Metric)=1005, Max Operating Temperature=155°C, Max Power Dissipation=63mW, Min Operating Temperature=-55°C, Package Quantity=1, Temperature Coefficient=100ppm/°C, Tolerance=5%, Voltage Rating=50V, Case/Package=0402, Composition="Thick Film", Contact Plating=Tin, Depth=0.5mm, Features="Automotive AEC-Q200", Height=0.35mm, Lead Free="Lead Free", Length=1mm, Military Standard=Not, Mount="Surface Mount", Number of Terminations=2, Packaging="Tape and Reel", Power Rating=63mW, Radiation Hardening=No, Resistance=5k1, Termination=SMD/SMT, Voltage Rating (DC)=50V, Weight=2.3E-05oz, Width=0.5mm
SW1 SW2: library part CMP-08834-000005-1, "SWITCH TACTILE SPST-NO 0.05A 12V", Ambient Temperature Range High=+70°C, Ambient Temperature Range Low=-25°C, Contact Current Rating=50mA, Contact Resistance=100mΩ, Manufacturer=Omron, Manufacturer Part Number=B3U-1000P-B, Operating Force=1.5N, Package=0, Temperature="-25°C to +70°C", Voltage Rating Dc=12V, Automotive=No, Category=Switch, ComponentLink2Description=Datasheet, ComponentLink2URL=https://omronfs.omron.com/en_US/ecb/products/pdf/en-b3u.pdf, Device Class L1=Electromechanical, Device Class L2=Switches, Device Class L3="Tactile Switches", Digikey Description="SWITCH TACTILE SPST-NO 0.05A 12V", Electromechanical Life=200000Cycles, Height=1.75mm, Lead Free=Yes, Mount="Surface Mount", Mouser Description="Tactile Switches Top Actuated with boss w/o ground", Octopart=https://octopart.com/b3u-1000p-b-omron-1057356, RoHS=TRUE, Temperature Range High=+70°C, Temperature Range Low=-25°C, Throw Configuration=SPST-NO
U1: library part CMP-209535-000001-1, "LDO Voltage Regulators 1A, 3.3V", Dropout Voltage=1.1V, Manufacturer="Advanced Monolithic Systems", Max Junction Temp=+125°C, Max Power Dissipation=1.2W, Max Supply Voltage=15V, Nominal Supply Current=5mA, Output Current=1A, Output Voltage=3.3V, Package=AMS1117, Temperature="-40°C to +125°C", Temperature Range Low=-40°C, Automotive=No, Category=IC, ComponentLink2Description=Datasheet, ComponentLink2URL=http://www.advanced-monolithic.com/pdf/ds1117.pdf, Device Class L1="Integrated Circuits (ICs)", Device Class L2="Power Management ICs", Device Class L3="Voltage Regulators - Linear", Height=1.8mm, Ipc Land Pattern Name=SOT229P700X180-4, Lead Free=Yes, Manufacturer Part Number=AMS1117-3.3, Number Of Outputs=1, Octopart=https://octopart.com/ams1117-3.3-advanced+monolithic+systems-25899300, Output Type=Fixed, RoHS=TRUE, Standoff Height=0.64mm, Temperature Range High=+125°C
U2: library part TI-TPS782XXDRV6-1600X1000TP, "Single Output LDO, 150 mA, Fixed 1.8 V Output, 2.2 to 5.5 V Input, with 0.5 uA Quiescent Current, 6-pin SON (DRV), -40 to 125 degC, Green (RoHS & no Sb/Br)", Manufacturer="Texas Instruments", PartNumber=TPS78218DRVR, Rating=Catalog, Accuracy(%)=3, ComponentLink1Description="Manufacturer URL", ComponentLink1URL=http://www.ti.com/, ComponentLink2Description=Datasheet, ComponentLink2URL=http://www.ti.com/general/docs/lit/getliterature.tsp?genericPartNumber=TPS78218&fileType=pdf, ComponentLink3Description="Package Specification", ComponentLink3URL=http://www.ti.com/litv/pdf/mpds216d, DatasheetVersion=SBVS115B, Eco-Plan="Green (RoHS & no Sb/Br)", Fixed Output Options(V)=1.8, Iout(Max)(A)=0.15, Iq(Typ)(mA)=0.0005, Mounting Technology="Surface Mount", PackageDescription="6-Pin Plastic Small Outline No-Lead, Body 2 x 2 mm, Pitch 0.65 mm", PackageReference=DRV0006A, PackageVersion=4206925/E, SubFamily="Single Channel LDO", Vdo(Typ)(mV)=130, Vin(Max)(V)=5.5, Vin(Min)(V)=2.2, Vout Adj(Max)(V)=1.8, Vout Adj(Min)(V)=1.8
U3 U4: library part CMP-2000-05026-1, "Intelligent Control LED Integrated Light Source, 3.5 to 5.3 V, -25 to 80 degC, 4-Pin SMD, RoHS, Tape and Reel", Color=Red,Green,Blue(RGB), Manufacturer=Adafruit-Industries-LLC, Package Description="4-Pin Surface Mount Device, Body 5 x 5 mm", Package Reference=1655, Category=Optoelectronics, Configuration=Discrete, Controller Type=-, Datasheet URL=http://datasheet.octopart.com/ADA1655-Adafruit-Industries-datasheet-32028139.pdf, Datasheet Version=May-13, Family=Addressable,Specialty, Interface=-, Manufacturer URL=https://www.adafruit.com/, Mounting Type=SurfaceMount, Number of LEDs=10, Series=Neopixel, Size / Dimension=5.00mmLx5.00mmW, Utilized LED=WS2812(5050)
U5: library part ESP32-S3-WROOM-1-N8R8, "Bluetooth, WiFi 802.11b/g/n, Bluetooth v5.0 Transceiver Module 2.4GHz PCB Trace Surface Mount", Package=None, Availability="In Stock", Check_prices=https://www.snapeda.com/parts/ESP32-S3-WROOM-1-N8R8/Espressif+Systems/view-part/?ref=eda, MF="Espressif Systems", MP=ESP32-S3-WROOM-1-N8R8, Price=None, Purchase-URL=https://pricing.snapeda.com/search?q=ESP32-S3-WROOM-1-N8R8&ref=eda, SnapEDA_Link=https://www.snapeda.com/parts/ESP32-S3-WROOM-1-N8R8/Espressif+Systems/view-part/?ref=snap
U6: library part CMP-2000-07532-1, "World’s Lowest Power 9-Axis MEMS MotionTracking(TM) Device, 1.71 to 3.6 V, -40 to 85 degC, 24-Pin QFN, RoHS, Tape and Reel", Manufacturer=TDK, Package Description="24-Pin Quad Flat No-lead Package, Body 3 x 3 mm, Pitch 0.4 mm", Package Reference=QFN-24, Datasheet URL=https://www.invensense.com/wp-content/uploads/2016/06/DS-000189-ICM-20948-v1.3.pdf, Datasheet Version="Rev. 1.3, 06/2017", Manufacturer URL=http://www.tdk.com/, Mounting Technology=SurfaceMount
U7: library part CMP-2000-05076-3, "SENSOR PRESSURE ABS", Case/Package=SMD/SMT, Max Operating Temperature=85°C, Min Operating Temperature=-40°C, Operating Pressure=15.95PSI, Lead Free="Lead Free", Max Pressure=290.08PSI, Number of Pins=8, Output Type=SPI, Port Style="No Port", Pressure Type=Absolute, Termination=SMD/SMT
U8: library part CMP-2000-07484-2, "SENSOR OPTICAL 200CM I2C", Manufacturer=STMicroelectronics, Max Supply Voltage=3.5V, Min Supply Voltage=1.6V, Operating Supply Current=0.016-19mA, Package=LGA-12, Temperature="-20°C to +70°C", Temperature Range High=+70°C, Temperature Range Low=-20°C, Automotive=No, Category=IC, ComponentLink2Description=Datasheet, ComponentLink2URL=https://www.st.com/resource/en/datasheet/vl53l0x.pdf, Device Class L1=Sensors, Device Class L2="Optical Sensors", Device Class L3=unset, Digikey Description="SENSOR OPTICAL 200CM I2C", Height=1.05mm, Lead Free=Yes, Manufacturer Part Number=VL53L0CXV0DH/1, Octopart=https://octopart.com/vl53l0cxv0dh%2F1-stmicroelectronics-71168165, RoHS=TRUE, Sensor Output=I2C

## Free pads (board coordinates)
  round 98.43 hole 78.74: 2(3670,1915)
  round 118.11 hole 98.43: 2(3670,3695)

## Via types
v1: diameter 23.62, hole 11.81, Top Layer to Bottom Layer, tented both sides, 86 vias

## Nets (pads, with @x,y where several pads share a name; then routed paths per layer and width w, separated by ;. In a path a pad name is that pad's centre, name@x,y a point inside that pad or via, vN(x,y) a via of type N, cw(c..) or ccw(c..) an arc to the next point about the centre after c; other vN are vias at no path point)
+1V8: C6.1 C12.1 C14.1 U2.5 U6.8 U7.6 | length 668.4
  Top Layer w5: 3785.94,3328.62 U6.8
  Top Layer w10: C6.1 3680.75,3280.75 3692.17,3292.17 3693.62,3292.17 3702.4,3300.94 3702.4,3324.27 3711.18,3333.05 3722.69,3333.05 3765.47,3375.83 ; 3785.94,3328.62 3765.47,3349.09 3765.47,3375.83 ; C12.1@3795,3438.88 C14.1@4005,3438.88 ; C12.1 3765.47,3409.72 3765.47,3375.83 ; C14.1 C14.1@4005,3438.88 ; U7.6 4060.31,3338.39 4060.31,3358.7 4005,3414.02 C14.1@4005,3438.88
+3V3: C3.1 C5.1 C7.1 C8.1 C11.1 C13.1 C18.1 C19.1 P1.5 P5.5 P6.5 P7.12 Q1.1 R1.1 R5.2 R6.2 R7.2 R9.2 R11.2 R14.2 U1.2 U1.4 U2.1 U2.3 U5.2 U6.13 U7.8 | length 5585.8
  Top Layer w5: U6.13 3836.18,3242.44 3836.18,3229.09 3856.79,3208.48 v1(3880.67,3208.48)
  Top Layer w10: P7.12 3315.24,1930 3315.24,2050.24 3399.76,2134.76 v1@3399.76,2238.15 ; v1@3395,2250 R11.2 ; v1(3550,3610) 3680,3610 3697.03,3592.97 3697.03,3578.72 C3.1 ; C5.1 3709.25,3518.5 3709.8,3518.5 3718.3,3518.5 C18.1 3773.5,3500 4088.41,3500 4108.64,3479.77 4118.87,3479.77 ; U7.8 4113.39,3390.87 4070.24,3434.02 C13.1 4070.24,3444.49 4083.59,3444.49 4118.87,3479.77 ; R14.2 4118.87,3479.77
  Top Layer w20: 3321.39,3190.2 3288.23,3157.04 3288.23,2843.05 3375.94,2755.33 U5.2 3375.94,2375.2 ; C8.1 C7.1 3375.94,2375.2 ; v1(3395,2245) 3374.25,2265.75 C19.1 3374.25,2353.5 3375.94,2355.2 3375.94,2375.2 ; C5.1@3709.8,3510 3718.3,3518.5
  Top Layer w25: U2.1 3703.68,3408.52 3703.68,3438.68 v1(3715,3450)
  Top Layer w30: 3321.39,3190.2 3540.2,3190.2 3590,3240 3590,3369.65 U2.3 3627.6,3447.43 3645.17,3465 3709.65,3465 ; C5.1@3709.8,3510 3709.8,3518.5 3709.8,3584.05 3744.89,3619.14 ; v1(3715,3450) 3715,3504.97
  Top Layer w40: 3744.89,3619.14 3820.42,3619.14 3841.34,3640.07 U1.4 U1.2
  Bottom Layer w5: C11.1 3880.67,3146.42 v1(3880.67,3208.48)
  Bottom Layer w10: v1(3395,2245) v1@3395.59,2245 ; R9.2@3416.85,2257.08 R9.2 ; R1.1 R1.1@3514.77,3615 ; R1.1@3517.38,3607.3 3520.08,3610 v1(3550,3610) ; R1.1@3517.38,3615.85 3515,3618.24 3515,3682.06 3520.86,3687.91 3521.65,3687.91 3532.4,3698.66 Q1.1 ; 3598.41,2265.23 R6.2 R5.2 ; 3598.41,2265.96 3622.24,2289.8 P6.5 3632.99,2426.57 3632.99,2442.99 3655,2465 3655,2598.69 3862.89,2806.57 ; P5.5 3631.5,2806.57 3862.89,2806.57 ; v1(3715,3450) 3715.27,3449.73 3740.27,3449.73 3778.82,3411.18 3778.82,3321.18 3878.06,3221.94 3878.06,3211.09 v1(3880.67,3208.48) ; P1.5 3862.89,2806.57
  Bottom Layer w20: v1@3395.59,2245 R9.2@3416,2265.41 ; R9.2@3425.32,2265 R7.2 ; R7.2@3525.23,2265.23 3598.41,2265.23
BMP_CS: R15.2 R17.1 U7.2 | length 645.2
  Top Layer w5: v1(4015,3170) 4015,3195 4073.29,3253.29 4073.39,3253.29 4079.47,3259.36 4079.47,3259.47 4083.41,3263.41 4083.41,3269.11 U7.2
  Top Layer w10: R17.1 4114.92,2729.77 4104.26,2740.42 4104.26,2740.51 4093.89,2750.88 v1(4093.89,2774.2) 4114.92,2795.23 R15.2
  Bottom Layer w5: v1(4015,3170) 4015,3060 4045,3030 4045,2823.09 v1(4093.89,2774.2)
BMP_CS_3V3: R15.1 U5.22 | length 93.7
  Top Layer w10: U5.22 4034.44,2834.77 R15.1
BOOT: SW1.2 U5.27 | length 1383
  Top Layer w5: SW1.2 3663.04,2161.11 3663.04,2193.04 v1(3685,2215)
  Top Layer w10: U5.27 3980,3117.6 v1(3980,3165)
  Bottom Layer w5: v1(3685,2215) 3762.82,2215 3887.82,2340 3993.33,2340 4060,2406.67 4060,2494.4 4015,2539.4 4015,2760 4030,2775 4030,3020 3980,3070 v1(3980,3165)
esc_p1_pwm: P4.4 U5.34 | length 147.2
  Top Layer w5: v1(3625,3160) 3625,3114.49 U5.34
  Bottom Layer w5: P4.4 3575,3185 3600,3160 v1(3625,3160)
esc_p2_pwm: P4.5 U5.35 | length 210.5
  Top Layer w5: U5.35 3575,3114.49 3575,3154.43 3615.57,3195 v1(3665,3195)
  Bottom Layer w5: P4.5 3624.21,3209.25 3637.46,3196 3664,3196 v1(3665,3195)
EXT_OPT+3V3: C15.1 C16.1 P7.1 R12.2 R13.2 U8.1 U8.11 | length 504.5
  Top Layer w10: v1(3335.34,1550.54) 3337.78,1548.1 3337.78,1527.46 3352,1513.24 3383.13,1513.24 3393.82,1523.93 3393.82,1531.12 C15.1 R13.2 R12.2 C16.1
  Bottom Layer w10: v1(3305.24,1680) 3366.5,1618.74 U8.11 3361.65,1591.65 3355.26,1591.65 3337.78,1574.17 3337.78,1552.98 v1(3335.34,1550.54) ; v1@3336.95,1551.35 3339.34,1551.35 3355.71,1534.98 3365.02,1534.98 U8.1
EXT_OPT_GND: C15.2 C16.2 P7.2 U8.2 U8.3 U8.4 U8.6 U8.12 | length 455.9
  Top Layer w10: v1(3355.24,1680) 3355.24,1677.91 3366.82,1666.33 C16.2 C16.2@3367.19,1595.98 ; C15.2 3367.19,1536.73 C16.2@3367.19,1595.98 ; v1(3421.24,1564.84) 3418.63,1567.45 3412.55,1567.45 3411.76,1568.24 3387.75,1568.24 3372.05,1583.93 3372.05,1591.12 C16.2@3367.19,1595.98
  Bottom Layer w10: v1@3355.24,1677.91 v1(3355.24,1680) ; U8.12 3381.72,1565 3393.15,1553.57 ; v1(3421.24,1564.84) 3418.63,1562.24 3401.81,1562.24 3393.15,1553.57 ; v1(3429.49,1497.09) U8.3 ; U8.6 3487.64,1560.16 3481.24,1560.16 3465.83,1544.74 3465.83,1538.35 U8.4 U8.3 ; 3393.15,1553.57 3393.15,1538.35 U8.2 U8.3
EXT_OPT_INT: P7.6 R12.1 U8.7 | length 147.6
  Top Layer w10: R12.1 3503.75,1623.09 3509.95,1629.3 3509.95,1633.32 3555.24,1678.6 v1(3555.24,1680)
  Bottom Layer w10: U8.7 3497.32,1601.34 3497.32,1616.67 3509.95,1629.3 v1@3509.95,1631.92
  other v1: 3509.95,1632.91
EXT_OPT_SCL: P7.3 U8.10 | length 86.5
  Bottom Layer w10: U8.10 3397.99,1670.67 3405.24,1677.91 v1(3405.24,1680)
EXT_OPT_SDA: P7.4 U8.9 | length 94.2
  Bottom Layer w10: U8.9 3429.49,1654.25 v1(3455.24,1680)
EXT_OPT_shutdown: P7.5 R13.1 U8.5 | length 243.6
  Top Layer w10: R13.1 R13.1 3511.9,1544.59 3521.64,1544.59 v1(3542.3,1565.25)
  Bottom Layer w10: U8.5 3497.32,1538.35 3515.4,1538.35 v1(3542.3,1565.25) 3542.3,1640.85 3505.24,1677.91 v1(3505.24,1680)
EXT_SCL: P2.2 P5.2 R6.1 U5.6 | length 968.8
  Top Layer w5: v1(3475,2705) 3475,2537.43 3554.04,2458.39 3554.04,2458.29 3575.94,2436.38 U5.6
  Top Layer w10: U5.6 3588.66,2411.85 3588.66,2389.42 3623.08,2355 v1(3650,2355)
  Bottom Layer w10: P5.2 3475,2815.43 v1(3475,2705) ; R6.1@3649.9,2299.91 3650,2300.01 R6.1 v1(3650,2355) 3730,2435 P2.2 P2.2@3981.26,2435
EXT_SDA: P2.3 P5.3 R5.1 U5.7 | length 907.9
  Top Layer w5: v1(3510,2750) 3510,2552.43 3604.04,2458.39 3604.04,2458.29 3625.94,2436.38 U5.7
  Top Layer w10: U5.7 3638.66,2411.85 3638.66,2396.4 3653.25,2381.81 3734.5,2381.81 3751.31,2365 v1(3755,2365)
  Bottom Layer w10: v1(3510,2750) 3510,2753.69 3523.82,2767.51 P5.3 ; R5.1@3755,2299.77 R5.1 v1(3755,2365) 3775.79,2385.79 P2.3 P2.3@3981.26,2385.79
GND: C1.1 C2.2 C3.2 C4.2 C5.2 C6.2 C7.2 C8.2 C9.2 C10.2 C11.2 C12.2 C13.2 C14.2 C17.2 C18.2 C19.2 D1.2 D2.2 J1.1 J1.2 J1.3 J1.4 J1.A1-B12 J1.B1-A12 P1.1 P1.MP1 P1.MP2 P2.1 P2.4 P2.5 P3.1 P3.4 P3.5 P4.1 P4.MP1 P4.MP2 P5.1 P5.MP1 P5.MP2 P6.1 P6.MP1 P6.MP2 P7.11 pad.2 R4.1 R8.2 R10.2 R17.2 R18.2 SW1.1 SW2.1 U1.1 U2.2 U2.4 U3.3 U4.3 U5.1 U5.40 U5.41_1 U5.41_2 U5.41_3 U5.41_4 U5.41_5 U5.41_6 U5.41_7 U5.41_8 U5.41_9 U5.41_10 U5.41_11 U5.41_12 U5.41_13 U5.41_14 U5.41_15 U5.41_16 U5.41_17 U5.41_18 U5.41_19 U5.41_20 U5.41_21 U6.11 U6.18 U7.1 U7.7 | length 11608
  Top Layer w5: v1(3781.61,3253.15) 3781.61,3213.39 3805,3190 3851.82,3190 ccw(c3880.12,3255.99) 3879.68,3184.19 3880.03,3184.18 ccw(c3880.67,3208.48) 3884.57,3184.48 3885.31,3184.6 ccw(c3880.12,3216.53) 3899.3,3190.48 ccw(c3874.61,3224.01) 3914.13,3210.89 ccw(c3909.37,3212.44) 3914.37,3212.44 U6.18 ; v1@3782.38,3252.38 3783.28,3253.28 3783.28,3272.46 3792.2,3281.38 U6.11 ; U7.1 4114.19,3272.7 4114.19,3250.81 v1(4115,3250)
  Top Layer w10: P7.11 3355.24,2045.24 v1(3405,2095) 3480.79,2095 3513.94,2128.15 3513.94,2145.87 SW1.1 ; 3673.62,3375.44 3682.41,3366.65 3722.39,3366.65 3740,3384.26 3740,3427.9 3777.61,3465.51 3790.14,3465.51 3795,3470.37 C14.2@4005,3470.37 ; R10.2 R8.2 3804.77,2299.77 ; J1.1 3774.92,2075.01 3789.76,2089.84 J1.A1-B12 3823.7,2085.16 3823.7,2060.99 3864.73,2019.96 4042.88,2019.96 4070.98,2048.07 J1.B1-A12 ; v1(3840,2335) 3804.77,2299.77 ; D2.2 v1(3945,2265) ; C14.2 4005.37,3470.37 4019.63,3470.37 ; v1(4028.66,2430) 4028.66,2312.09 C17.2 ; C13.2@4064.63,3470.37 4019.63,3470.37 ; U7.7 4087.8,3370.12 4085,3372.91 v1(4085,3375) 4032.95,3427.05 4032.95,3457.05 4019.63,3470.37 ; J1.2 4115.08,2075.01 4100.24,2089.84 J1.B1-A12 ; 3804.77,2299.77 3839.34,2299.77 3882.64,2256.47 3934.3,2256.47 3942.83,2265 v1(3945,2265) ; v1(3945,2265) 3946.22,2263.78 4073.03,2263.78 C17.2 ; J1.B1-A12 4070.98,2180.98 4105,2215 4105,2248.45 4092.94,2260.51 4080.24,2260.51 C17.2
  Top Layer w20: U5.40 3328.54,3110.95 3328.54,3066.46 3345.54,3049.46 3424.46,3049.46 v1(3425,3050) 3475,3050 3630,2895 3689.55,2895 3723.56,2860.98 3723.56,2784.55 ; C19.2 C19.2@3415,2325 ; v1(3415,2345) C19.2@3415,2325 ; C9.2@3450,2325 C19.2@3415,2325 ; U4.3 3511.11,3265.39 3511.11,3312.55 3489.64,3334.02 v1(3489.64,3335) 3465,3359.64 3465,3485.39 3509.65,3530.04 U3.3 ; v1@3645,3349.02 3631.38,3335.4 3631.38,3316.54 U2.4 3627.6,3266.65 C6.2 ; v1(3645,3350) 3667.03,3372.03 ; 3665,3370.98 U2.2 ; U5.41_6 3692.72,2772.83 3711.85,2772.83 3723.56,2784.55 ; v1(3755,2635) 3755,2753.11 3723.56,2784.55 ; C18.2 v1(3785,3550) ; v1(4095,2650) 4095.69,2650.69 4095.69,2671.01 4114.92,2690.23 R17.2
  Top Layer w30: 3290,2225.29 3290,2325 3290,2381.38 3318.66,2410.04 3323.23,2410.04 3325.94,2412.76 U5.1 ; 3292.64,2225.29 3313.72,2204.21 ; SW2.1 3303.82,2155.75 3303.82,2173.71 v1@3330.79,2200.68 ; v1(3645,3505) 3660,3520 C3.2@3660,3570 ; v1(3921.57,3564.41) 3927.01,3569.84 U1.1 4110,3571.18 v1(4110,3605)
  Bottom Layer w10: R4.1 3329.25,3685.98 C4.2 3329.25,3547.09 3321.1,3538.94 D1.2 3321.1,3345.04 P4.MP1 3326.97,3321.46 3396.93,3251.5 3416.61,3251.5 P4.1@3426.97,3241.14 ; 3426.97,2998.03 3465,2960 3692.64,2960 P5.MP2 ; v1(3645,3350) 3648.69,3350 3658.69,3340 3706.06,3340 3779.01,3267.06 3779.01,3255.75 v1(3781.61,3253.15) ; P6.MP2 3722.64,2512.28 3758.98,2475.94 3764.17,2475.94 3765.12,2475 3972.05,2475 3981.26,2484.21 3992.01,2473.46 4009.3,2473.46 4026.06,2456.71 4026.06,2432.61 v1(4028.66,2430) ; v1@3787.9,3253.15 3821.85,3253.15 3853.86,3221.14 3853.86,3133.21 ; P3.4@3810.39,3746.16 3842.46,3778.23 3858.23,3778.23 3865,3785 4037.26,3785 v1@4057.11,3765.15 ; C11.2 3874.76,3119.49 3867.58,3119.49 3853.86,3133.21 ; v1(3930,3040) 3930,3007.92 3925.51,3003.43 ; v1(3945,2265) 4069.13,2265 P2.5 P2.4 4089.53,2640.84 4095,2646.31 v1(4095,2650) ; P1.1 3925.51,3003.43 ; v1@4060.54,3763.24 4061.76,3764.46 4097.83,3764.46 4110,3752.28 v1(4110,3605) ; v1(4085,3375) 4115,3345 v1(4115,3250) ; P1.MP1 4106.89,3103.82 4134.29,3076.42 4134.29,2960.71 v1@4135,2960 ; P1.MP2@4095,2700.35 4101.06,2700.35 4134.29,2733.58 v1(4134.29,2960) ; 3853.86,3133.21 3853.86,3130.93 3842.42,3119.49 3835.24,3119.49 C10.2 3828.19,3112.44 3828.19,2901.98 3841.79,2888.38 3846.85,2888.38 R18.2 3863.15,2888.38 3868.21,2888.38 3888.19,2908.36 3888.19,2966.11 3925.51,3003.43
  Bottom Layer w20: P5.MP1 3325,2947.72 3384.62,3007.34 3412.34,3007.34 3425,3020 ; v1(3405,2095) 3365,2095 3335,2125 v1(3335,2205) 3335,2289.4 3390.6,2345 v1(3415,2345) 3425.39,2355.39 P6.1 3425.39,2431.57 3419.65,2437.32 3399.96,2437.32 3325,2512.28 P6.MP1 3325,2547.72 3426.57,2649.29 3426.57,2885 3426.97,2885.39 3426.97,2998.03 3426.97,3020 ; 3425.69,3021.28 3425.69,3049.31 v1(3425,3050) 3425,3050.98 3426.97,3052.95 3426.97,3224.61 P4.1 ; P6.MP2 3753.98,2561.34 3753.98,2633 3755,2634.02 v1(3755,2635) ; J1.1 J1.3 J1.4 J1.2 ; v1@3785,3549.02 v1(3785,3550) ; C2.2@3789.76,3525 3789.76,3515.98 C2.2 ; v1(4095,2650) P1.MP2@4095,2700.35
  Bottom Layer w30: P4.1 3427.36,3292.36 3470,3335 ; v1@3785,3549.02 3785,3529.76 C2.2@3789.76,3525
  Bottom Layer w40: 3470,3335 v1(3489.64,3335) 3630,3335 v1(3645,3350) v1(3645,3505) 3665,3525 3789.76,3525 3843.46,3525 C1.1@3876.73,3491.73 ; C1.1@3888.78,3460 3888.78,3503.78 3921.57,3536.57 v1(3921.57,3564.41) P3.1
  other v1: 3605,2220 4102.81,2447.19 3475,2495 3910,2520 3315,2740 3945,2745 3370,2825 3720,3035 3705,3175 3990,3375 3810,3385 3280,3435 3525,3455 3410,3645 3280,3730 4057.8,3764.46
Hall_INT_x: P5.4 U5.4 | length 604.2
  Top Layer w5: U5.4 3460.73,2439.78 3460.73,2454.27 3415,2500 3415,2755 3520,2860 v1(3575,2860)
  Bottom Layer w5: P5.4 3575,2817.8 v1(3575,2860)
Hall_INT_y: P6.4 U5.5 | length 151.4
  Top Layer w5: U5.5 3525.94,2412.76 3547.85,2390.85 3547.85,2382.2 v1(3575,2355.06)
  Bottom Layer w5: P6.4 3575,2413.86 v1(3575,2355.06)
IMU_CS: R16.2 R18.1 U6.22 | length 457.2
  Top Layer w5: U6.22 3937.56,3312.32 3948.45,3312.32 3949,3311.77 3951.46,3311.77 3962.88,3300.35 3962.88,3256.78 v1(3941.1,3235)
  Bottom Layer w5: R16.2 3865.65,2995.88 3867.18,2995.88 3905.04,3033.74 3905.04,3198.93 v1(3941.1,3235)
  Bottom Layer w10: R18.1 R16.2
IMU_CS_3V3: R16.1 U5.31 | length 141.3
  Top Layer w10: U5.31 3783.66,3105.83 3783.66,3083.3 3821.17,3045.8 v1(3855,3045.8)
  Bottom Layer w10: R16.1 v1(3855,3045.8)
IMU_INT: U5.21 U6.12 | length 664
  Top Layer w5: v1(3812.19,3217.19) 3812.19,3265.63 U6.12 ; v1(3815,2845) 3960,2845 3995.73,2809.27 4009.94,2809.27 U5.21
  Bottom Layer w5: v1(3812.19,3217.19) 3812.19,3214.26 3800,3202.07 3800,2940 3815,2925 v1(3815,2845)
LED: Q1.2 R1.2 U5.23 | length 1358.9
  Top Layer w5: v1(3410,3350) v1(3474.34,3285.66) ; v1(3785.79,2905) 3785.79,2904.21 3815,2875 3994.29,2875 4013.35,2894.06 U5.23
  Bottom Layer w5: v1(3410,3350) 3464.58,3404.58 3464.58,3599.43 3475.23,3610.08 3457.6,3627.72 Q1.2 ; v1(3474.34,3285.66) 3552.52,3285.66 3561.86,3295 3645,3295 3785,3155 3785,2905.79 v1(3785.79,2905)
NetC10_1: C10.1 U6.10 | length 231.5
  Top Layer w5: U6.10 3787.13,3297.13 3755,3265 3755,3220.86 3807.74,3168.12 3824.61,3168.12 v1(3827.05,3165.69)
  Bottom Layer w20: v1(3827.05,3165.69) 3827.05,3164.71 3829.76,3161.99 3829.76,3145.98 C10.1
NetD2_4: D2.4 J1.A7 J1.B7 | length 202.4
  Top Layer w5: D2.4 3915.47,2201.85 3915.47,2152.74 ; J1.B7 3915.47,2152.74 ; J1.A7 3951.44,2093.25 3951.44,2116.78 3915.47,2152.74
NetD2_6: D2.6 J1.A6 J1.B6 | length 217.4
  Top Layer w5: J1.A6 3938.56,2086.44 3938.56,2062.91 3944.64,2056.83 3965.05,2056.83 3971.12,2062.91 3971.12,2086.44 J1.B6 3974.53,2201.85 D2.6
NetJ1_A5: J1.A5 R8.1 | length 256.3
  Top Layer w10: R8.1 3844.77,2260.23 3875,2230 3875,2175 3894.88,2155.12 3894.88,2090.75 J1.A5
NetJ1_B5: J1.B5 R10.1 | length 413.1
  Top Layer w10: R10.1 3710,2235 v1(3800,2145) ; v1(4005,2139.43) 4013.9,2130.53 J1.B5
  Bottom Layer w10: v1(3800,2145) 3995.74,2145 4001.31,2139.43 v1(4005,2139.43)
NetQ1_3: Q1.3 R2.2 U3.4 | length 190.6
  Top Layer w5: R2.2@3450,3740.15 3449.77,3739.92 3494.43,3695.26 3494.43,3675.18 3509.65,3659.96 U3.4
  Top Layer w10: R2.2@3450,3740.15 3457.92,3748.07 3457.92,3764.48 3460,3766.55 v1(3460,3768.64)
  Bottom Layer w10: v1(3460,3768.64) 3460,3770.58 3469.42,3780 3494.37,3780 Q1.3
NetU3_2: U3.2 U4.4 | length 443.7
  Top Layer w10: U3.2 3341.26,3542.76 3445.76,3542.76 3463.63,3560.63 3556.32,3560.63 3563.86,3553.09 3563.86,3415.55 3533.27,3384.96 U4.4
OPT_INT: P7.7 U5.24 | length 1416.2
  Top Layer w5: U5.24 4040.37,2928.84 4076.16,2928.84 4150,2855 4150,2460 v1(4060,2370)
  Top Layer w10: P7.7 3555.24,1990 3565.24,2000 v1(3595,2000)
  Bottom Layer w5: v1(3595,2000) 3905,2310 3999.07,2310 4059.07,2370 v1(4060,2370)
OPT_shutdown: P7.8 U5.25 | length 1832
  Top Layer w5: P7.8 3517.74,1932.5 3517.74,2017.74 3535,2035 3695,2035 3745,1985 4120,1985 4170,2035 4170,2865 4056.16,2978.84 4040.37,2978.84 U5.25
RST: C9.1 R11.1 SW2.2 U5.3 | length 320.1
  Top Layer w10: U5.3 3437.17,2413.34 3437.17,2387.33 3481.78,2342.72 3481.78,2328.97 3489.77,2320.98 3489.77,2221.76 3451.47,2183.46 3447.68,2183.46 3436.93,2172.72 SW2.2
RX: P1.2 U5.36 | length 552.3
  Top Layer w5: U5.36 3541.16,3098.33 3541.16,3048.84 3645,2945 3902.76,2945 3912.76,2955 v1(3915,2955)
  Bottom Layer w5: v1(3915,2955) 3974.21,2955 P1.2
SCL: P6.2 P7.10 R9.1 U5.12 | length 1541.2
  Top Layer w5: P7.10 3417.74,1932.5 3417.74,2017.74 3475,2075 3515,2075 3549.19,2109.19 3549.19,2299.19 3573.3,2323.3 3793.36,2323.3 3861.36,2391.3 3861.36,2409.99 U5.12 3875.94,2489.06 3815,2550 v1(3590,2550)
  Bottom Layer w10: R9.1 3425.08,2304.77 3474.61,2354.29 P6.2 3485.35,2426.57 3485.35,2442.32 3495.2,2452.17 3495.2,2455.2 v1(3590,2550)
SCLK: U5.29 U6.23 U7.4 | length 357.5
  Top Layer w5: U5.29 3891.16,3128.76 3891.16,3144.94 3975,3228.78 3975,3250 ; U6.23 3961.46,3328.62 3975,3315.09 3975,3250 ; U7.4 3998.5,3273.5 3975,3250
SDA: P6.3 P7.9 R7.1 U5.17 | length 1247.8
  Top Layer w5: P7.9 3467.74,1932.5 3467.74,2017.74 3505,2055 3530,2055 3564.04,2089.04 3564.04,2270.27 3592.76,2298.99 v1(3592.93,2298.99) ; v1(3625,2585) 4016.1,2585 U5.17
  Bottom Layer w5: R7.1 3530.55,2298.99 v1(3592.93,2298.99)
  Bottom Layer w10: R7.1 3525,2414.65 P6.3 3534.57,2426.57 3534.57,2444.57 3625,2535 v1(3625,2585)
SDI: U5.28 U6.24 U7.3 | length 389
  Top Layer w5: U5.28 3941.16,3128.76 3941.16,3171.16 4017.86,3247.86 4042.86,3247.86 4057.81,3262.81 4057.81,3272.07 4062.2,3276.46 4057.81,3280.85 4057.81,3283.71 4046.52,3295 4020,3295 3970.63,3344.37 U6.24
SDO: U5.30 U6.9 U7.5 | length 878.6